# Altium PCB RPi_SyncInputAdapter_PCBDoc.PcbDoc
Units mm, origin at the board's own origin, x right, y up, seen from the top; angles counter-clockwise.
Board outline 48 x 53 mm, 2 copper layers (Top Layer, Bottom Layer), stack 1.271 mm thick; 16 components, 17 nets, 56 pads, 2 vias.
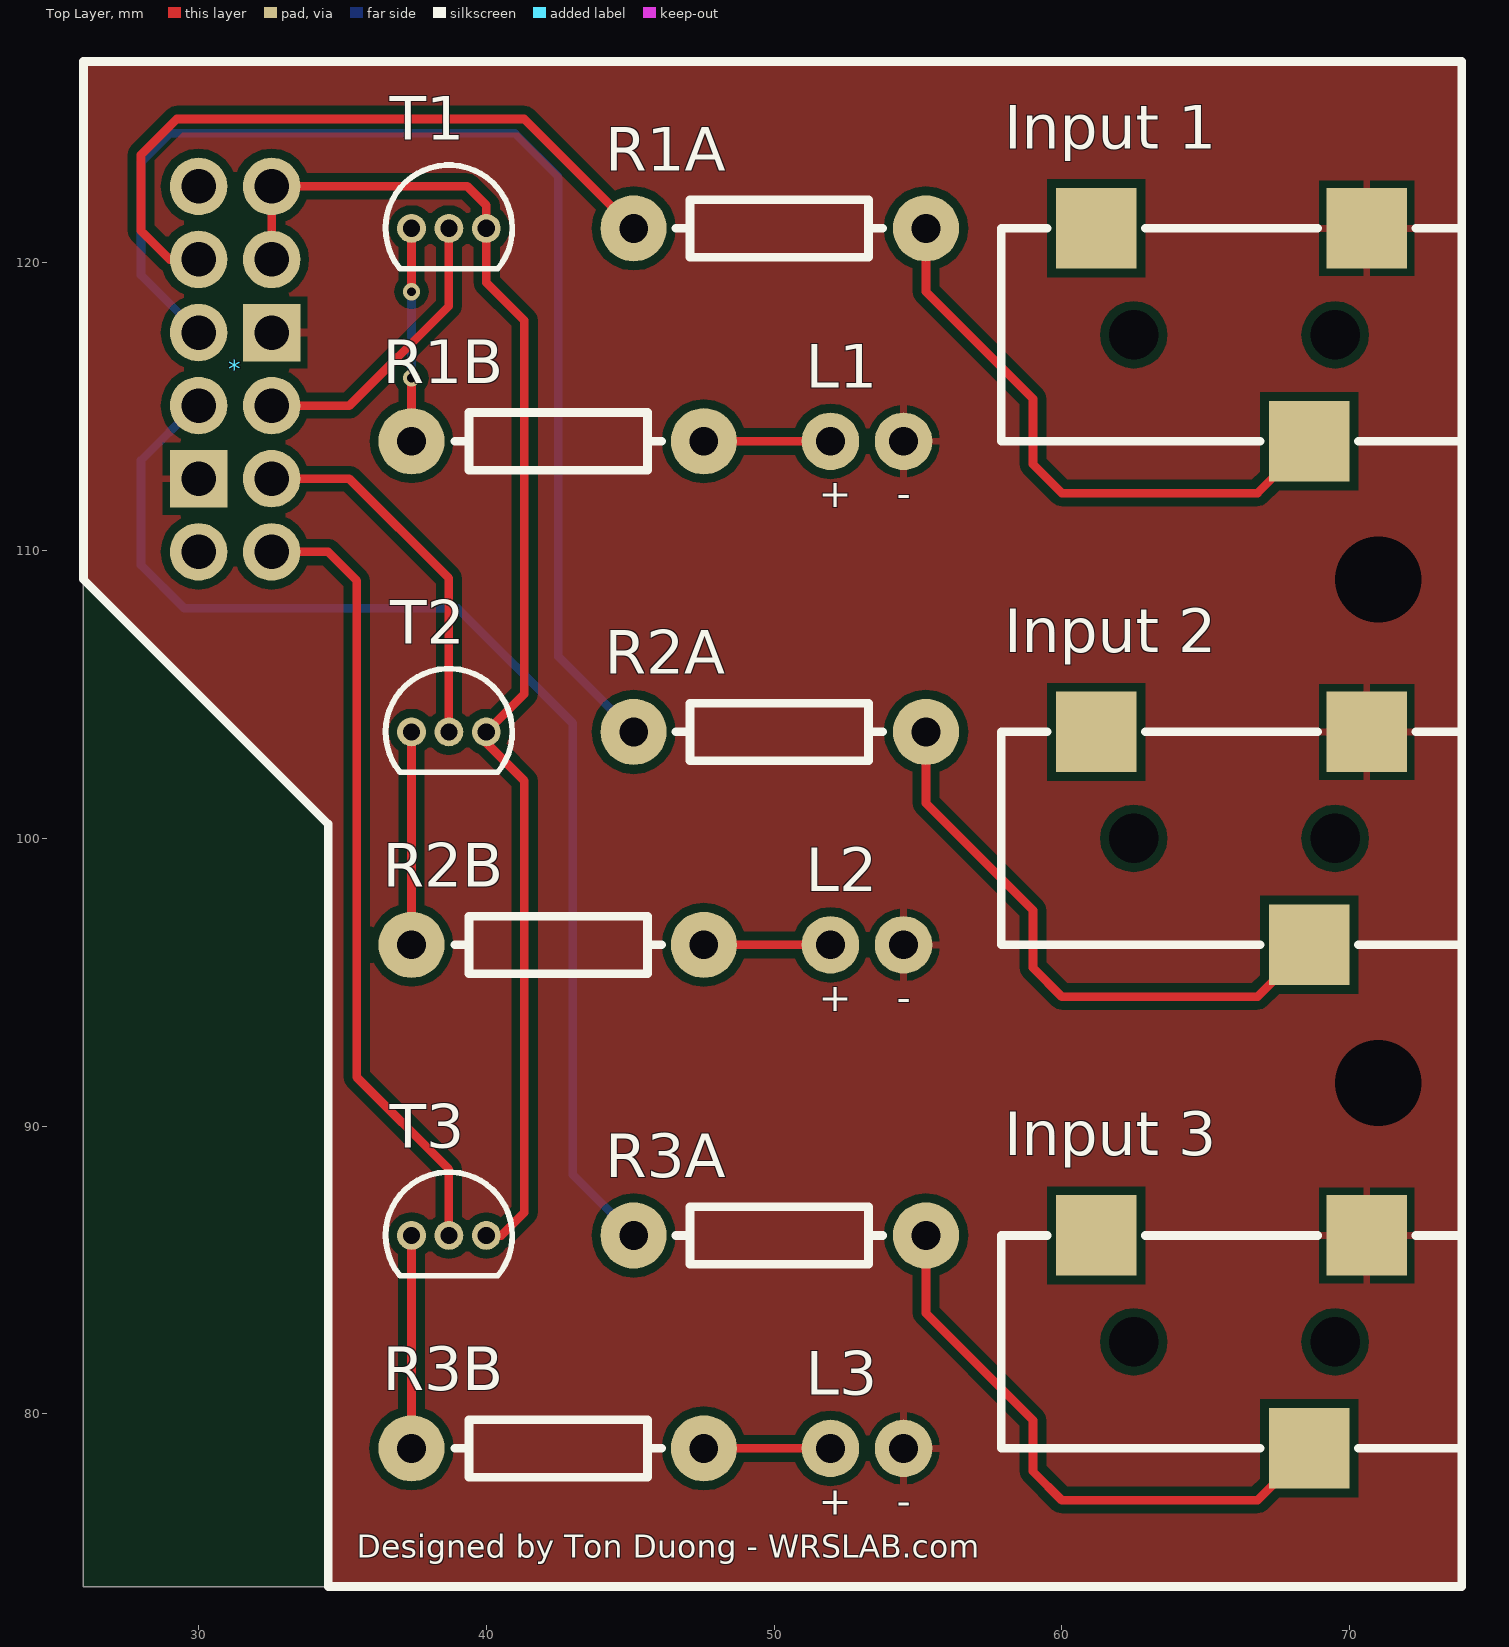
[diagram p0: Top Layer view]
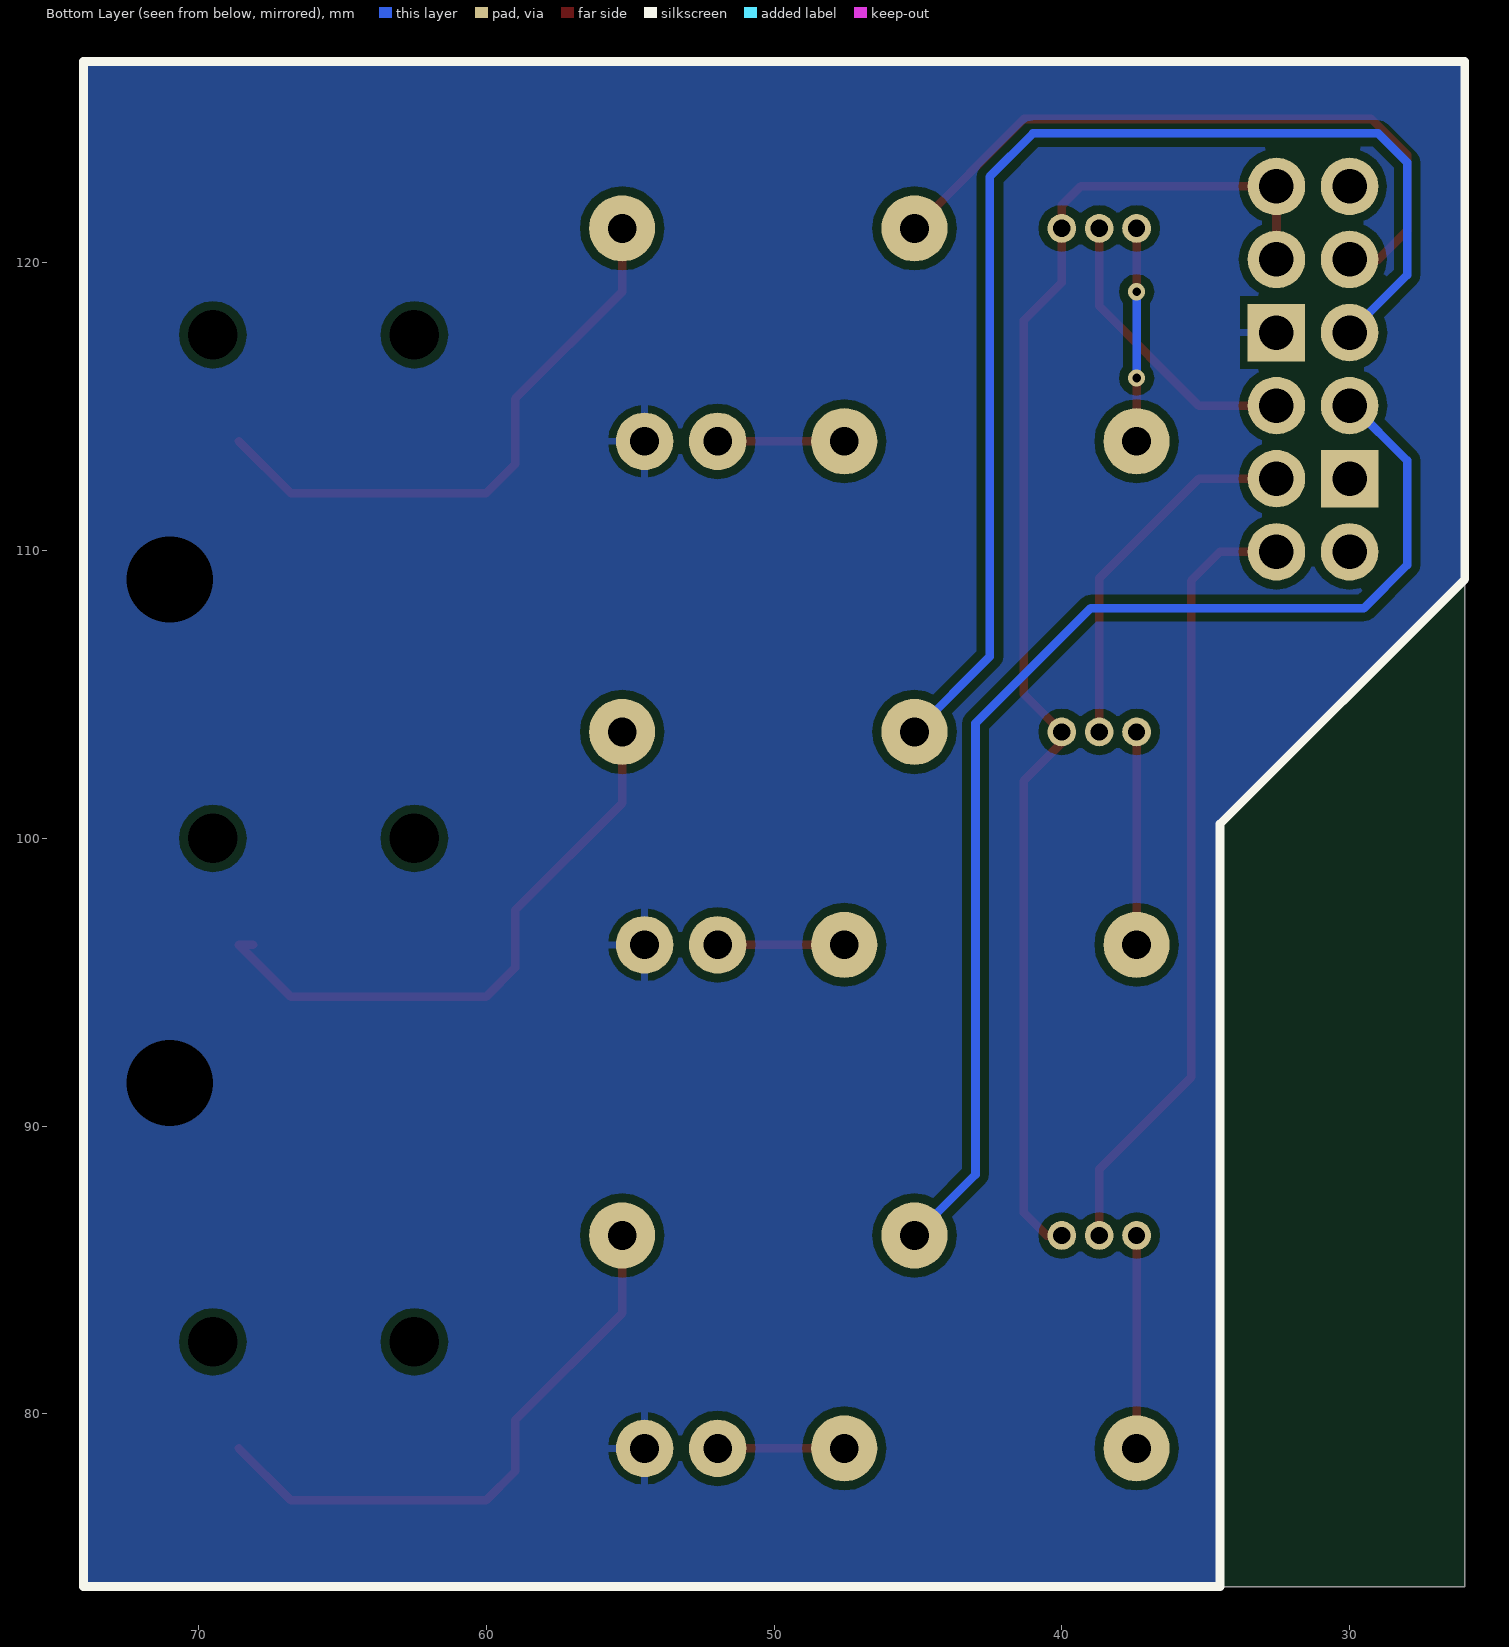
[diagram p1: Bottom Layer view, seen from below]

## Layer stack, top to bottom
Top Solder: solder mask 0.0102, Solder Resist, Dk 3.5
Top Layer: signal copper 0.0356
Dielectric 1: dielectric 1.2, FR-4, Dk 4.8
Bottom Layer: signal copper 0.0356
Bottom Solder: solder mask 0.0102, Solder Resist, Dk 3.5

## Board outline
26,127 74,127 74,74 26,74

## Design rules (kind name [scope] priority, off if disabled: settings)
Clearance [All] p1: gap=0.3 ignorepadtopadclearanceinfootprint=FALSE
PolygonConnect [All] p1: connectstyle=Relief reliefconductorwidth=0.254 reliefentries=4 polygonreliefangle="90 Angle" airgapwidth=0.254
RoutingVias [All] p1: holewidth=0.3 width=0.6 viastyle="Through Hole" minholewidth=0.3 minwidth=0.6 maxholewidth=0.3 maxwidth=0.6
SolderMaskExpansion [All] p1: expansion=0.102
Width [All] p1: maxlimit=1 minlimit=0.3 preferedwidth=0.5
30 further rules are at their usual default settings.

## Components (designator, comment, footprint, x,y, rotation, side; value= is the part's Value field where it differs from the comment)
* "RPi_Pins" RPi_Interface 30,122.66 r0 top
"Input 1" "3.5 mm Jack" 3PolesAudioJack_SMD 70.6,121.2 r270 top
"Input 2" "3.5 mm Jack" 3PolesAudioJack_SMD 70.6,103.7 r270 top
"Input 3" "3.5 mm Jack" 3PolesAudioJack_SMD 70.6,86.2 r270 top
L1 "INL-3AA30" LED 51.96,113.8 r0 top
L2 "INL-3AA30" LED 51.96,96.3 r0 top
L3 "INL-3AA30" LED 51.96,78.8 r0 top
R1A "InputResistor" TypicalResistor 55.28,121.2 r180 top
R1B "LEDResistor" TypicalResistor 37.4,113.8 r0 top
R2A "InputResistor" TypicalResistor 55.28,103.7 r180 top
R2B "LEDResistor" TypicalResistor 37.4,96.3 r0 top
R3A "InputResistor" TypicalResistor 55.28,86.2 r180 top
R3B "LEDResistor" TypicalResistor 37.4,78.8 r0 top
T1 "PN2222" PN2222_Transistor 37.4,121.2 r90 top
T2 "PN2222" PN2222_Transistor 37.4,103.7 r90 top
T3 "PN2222" PN2222_Transistor 37.4,86.2 r90 top

## Footprints (in the part's own frame and the unit in brackets; to place one, negate y for a bottom-side part, rotate by r counter-clockwise, add the part's x,y. Pads: shape width x height; smd on the part's side, far side on the other; paste and mask are expansions set on the pad)
3PolesAudioJack_SMD [mm]
  rect 2.8x2.8 smd: 1(0,0) 2(0,-9.4) 3(7.4,-2)
  round 1.524 hole 1.72: 4(3.7,-1.1) 5(3.7,-8.1)
  silkscreen extent 0,-12.7 7.4,3.3, body extent -0.8,-12.2 8.2,4.8, height 5.11
LED [mm]
  round 2 hole 1: 1(0,0) 2(2.54,0)
PN2222_Transistor [mm]
  round 1 hole 0.6: 1(0,0) 2(0,-1.3) 3(0,-2.6)
  silkscreen extent -1.4,-3.5 2.2,0.9
RPi_Interface [mm]
  round 2 hole 1.2: 1(0,0) 2(2.54,0) 3(0,-2.54) 4(2.54,-2.54) 5(0,-5.08) 7(0,-7.62) 8(2.54,-7.62) 10(2.54,-10.16) 11(0,-12.7) 12(2.54,-12.7)
  rect 2x2 hole 1.2: 6(2.54,-5.08) 9(0,-10.16)
TypicalResistor [mm]
  round 2.3 hole 1: 1(0,0) 2(10.16,0)
  silkscreen extent 1.5,-1 8.7,1

## Part data
"Input 1" "Input 2" "Input 3": library part SJ-3523-SMT-TR, "CONN JACK STEREO 3.5MM SMD R/A", Color=Black, Current Rating=1A, Manufacturer=CUI, Package Quantity=1000, Supplier Part Number 1=CP-3523SJDKR-ND, Voltage Rating=12V, ComponentLink1Description=https://www.digikey.com/en/products/detail/cui-devices/SJ-3523-SMT-TR/669704, ComponentLink1URL=https://www.digikey.com/en/products/detail/cui-devices/SJ-3523-SMT-TR/669704, Connector Type=Jack, Contact Material="Copper Alloy", Contact Plating=Silver, Gender=Female, Housing Material=Polyamide, Lead Free="Lead Free", Manufacturer Part Number=SJ-3523-SMT-TR, Mount="Surface Mount", Number of Conductors=3, Number of Ports=1, Number of Positions=3, Orientation=Horizontal, Packaging="Cut Tape", Pricing 1="1=0.94, 10=0.827, 25=0.778, 50=0.7456, 100=0.7133, 250=0.6484, 500=0.58358 (USD)", Shielding=Unshielded, Stock 1=63484, Supplier 1=Digi-Key, Termination=SMD/SMT, Weight=0.037038oz
L1 L2 L3: "LED AMBER CLEAR 3MM T/H", Case/Package=Radial, Color=Orange, Forward Voltage=2V, Lens Color=Colorless, Manufacturer=Inolux, Supplier Part Number 1=1830-1001-ND, Test Current=20mA, ComponentLink1Description=http://www.inolux-corp.com/datasheet/Display/Through-Hole-Display/Round-Lamp/INL-3AX30%20series.pdf?src-supplier=Digi-Key, ComponentLink1URL=http://www.inolux-corp.com/datasheet/Display/Through-Hole-Display/Round-Lamp/INL-3AX30%20series.pdf?src-supplier=Digi-Key, Dominant Wavelength=610nm, Height=5.08mm, Lens Size=3mm, Lens Style=Round,Domed, Lens Transparency=Clear, Luminous Intensity=460mcd, Manufacturer Part Number=INL-3AA30, Mount="Through Hole", Packaging=Bulk, Pricing 1="1=0.32, 10=0.256, 100=0.115, 500=0.10388, 1000=0.08533, 2000=0.0742, 5000=0.06678, 10000=0.05936, 25000=0.05565 (USD)", Stock 1=1251, Supplier 1=Digi-Key, Viewing Angle=30°
T1 T2 T3: "TRANS NPN 30V 0.6A TO92", Case/Package=TO-92-3, Collector-emitter Voltage-Max=1.6V, Collector Base Voltage (VCBO)=60V, Collector Emitter Breakdown Voltage=30V, Emitter Base Voltage (VEBO)=5V, Frequency=250MHz, Manufacturer="ON Semiconductor / Fairchild", Max Collector Current=600mA, Max Operating Temperature=150°C, Max Power Dissipation=625mW, Min Operating Temperature=-55°C, Package Quantity=5000, Supplier Part Number 1=PN2222OS-ND, Collector Emitter Saturation Voltage=1.6V, Collector Emitter Voltage (VCEO)=30V, ComponentLink1Description=http://www.onsemi.com/pub/Collateral/PN2222-D.PDF?src-supplier=Digi-Key, ComponentLink1URL=http://www.onsemi.com/pub/Collateral/PN2222-D.PDF?src-supplier=Digi-Key, Element Configuration=Single, Gain Bandwidth Product=250MHz, hFE Min=35, Manufacturer Part Number=PN2222, Mount="Through Hole", Number of Elements=1, Number of Pins=3, Packaging=Bulk, Polarity=NPN, Power Dissipation=625mW, RoHS Compliant=No, Series=-, Stock 1=0, Supplier 1=Digi-Key, Transition Frequency=250MHz

## Free pads (board coordinates)
  round 1.524 hole 3: 4(71,109) 5(71,91.5)

## Via types
v1: diameter 0.6, hole 0.3, Top Layer to Bottom Layer, tented both sides, 2 vias

## Nets (pads, with @x,y where several pads share a name; then routed paths per layer and width w, separated by ;. In a path a pad name is that pad's centre, name@x,y a point inside that pad or via, vN(x,y) a via of type N, cw(c..) or ccw(c..) an arc to the next point about the centre after c; other vN are vias at no path point)
+5: *.2 *.4 T1.3 T2.3 T3.3 | length 48.6
  Top Layer w0.3: *.4 *.2 39.34,122.66 40,122 T1.3 40,119.32 41.32,118 41.32,105.02 T2.3 40,103.32 41.32,102 41.32,87 40.52,86.2 T3.3
GND: "Input 1.1" "Input 2.1" "Input 3.1" *.6 *.9 L1.2 L2.2 L3.2 pad.4 pad.5
Net*_3: *.3 R1A.2 | length 24.9
  Top Layer w0.3: *.3@29.53,120.59 *.3 29,120.12 28,121.12 28,123.76 29.24,125 41.32,125 R1A.2
Net*_5: *.5 R2A.2 | length 42.7
  Bottom Layer w0.3: *.5 28,119.58 28,123.5 29,124.5 41,124.5 42.5,123 42.5,106.32 R2A.2
Net*_7: *.7 R3A.2 | length 42.5
  Top Layer w0.3: *.7@29.904,115.04 *.7
  Bottom Layer w0.3: *.7 29.904,115.04 28,113.136 28,109.5 29.5,108 39,108 43,104 43,88.32 R3A.2
Net*_8: *.8 T1.2 | length 10.3
  Top Layer w0.3: *.8 35.24,115.04 38.7,118.5 T1.2
Net*_10: *.10 T2.2 | length 12.9
  Top Layer w0.3: *.10 35.24,112.5 38.7,109.04 T2.2
Net*_12: *.12 T3.2 | length 27.5
  Top Layer w0.3: *.12 34.5,109.96 35.5,108.96 35.5,91.7 38.7,88.5 T3.2
"NetInput 1_3": "Input 1.3" R1A.1 | length 20.5
  Top Layer w0.3: R1A.1 55.28,119 59,115.28 59,113 60,112 66.8,112 68.6,113.8
"NetInput 2_3": "Input 2.3" R2A.1 | length 21
  Top Layer w0.3: R2A.1 55.28,101.22 59,97.5 59,95.5 60,94.5 66.8,94.5 68.6,96.3 68.1,96.3
"NetInput 3_3": "Input 3.3" R3A.1 | length 20.5
  Top Layer w0.3: R3A.1 55.28,83.5 59,79.78 59,78 60,77 66.8,77 68.6,78.8
NetL1_1: L1.1 R1B.2 | length 4.4
  Top Layer w0.3: R1B.2 L1.1
NetL2_1: L2.1 R2B.2 | length 4.4
  Top Layer w0.3: R2B.2 L2.1
NetL3_1: L3.1 R3B.2 | length 4.4
  Top Layer w0.3: R3B.2 L3.1
NetR1B_1: R1B.1 T1.1 | length 7.4
  Top Layer w0.3: R1B.1 v1(37.4,116) ; v1(37.4,119) T1.1
  Bottom Layer w0.3: v1(37.4,116) v1(37.4,119)
NetR2B_1: R2B.1 T2.1 | length 7.4
  Top Layer w0.3: R2B.1 T2.1
NetR3B_1: R3B.1 T3.1 | length 7.4
  Top Layer w0.3: R3B.1 T3.1
pads on no net: "Input 1.2" "Input 1.4" "Input 1.5" "Input 2.2" "Input 2.4" "Input 2.5" "Input 3.2" "Input 3.4" "Input 3.5" *.1 *.11

## Polygon pours and split planes (outlines as drawn)
GND on Bottom Layer (solid, pour order 24): 18,114
GND on Bottom Layer (solid, pour order 22): 26,127 74,127 74,74 34.5,74 34.5,100.5 26,109
GND on Bottom Layer (solid, pour order 10): 26,127 74,127 74,74 34.5,74 34.5,100.5 26,109
GND on Bottom Layer (solid, pour order 12): 25,122
GND on Bottom Layer (solid, pour order 14): 24.5,94.5
GND on Top Layer (solid, pour order 26): 26,127 74,127 74,74 34.5,74 34.5,100.54 26.08,108.96 26,108.96
GND on Top Layer (solid, pour order 28): 23.5,115

## Silkscreen, mask and mechanical layers (free items; w line width, h text height)
Top Overlay:
  lines w0.3: 26,109 26,127 73.9,127 73.9,74 34.5,74 34.5,100.5 26,109
  text "Designed by Ton Duong - WRSLAB.com" at 35.5,75 h0.8
Bottom Overlay:
  lines w0.3: 26,109 26,127 74,127 74,74 34.5,74 34.5,100.5 26,109

## Dimensions
74,127 to 74,74 on Top Layer
26,127 to 74,127 on Top Layer

## Text inside footprints (layer, text, board x,y; h text height)
L1: Top Overlay "+" at 51.56,111.5 h1; Top Overlay "-" at 54.26,111.5 h1
L2: Top Overlay "+" at 51.56,94 h1; Top Overlay "-" at 54.26,94 h1
L3: Top Overlay "+" at 51.56,76.5 h1; Top Overlay "-" at 54.26,76.5 h1